# Altium PCB PCB1.PcbDoc
Units mm, origin at the board's own origin, x right, y up, seen from the top; angles counter-clockwise.
Board outline 31.39 x 23.51 mm, 2 copper layers (Top Layer, Bottom Layer); 24 components, 18 nets, 48 pads, 0 vias.
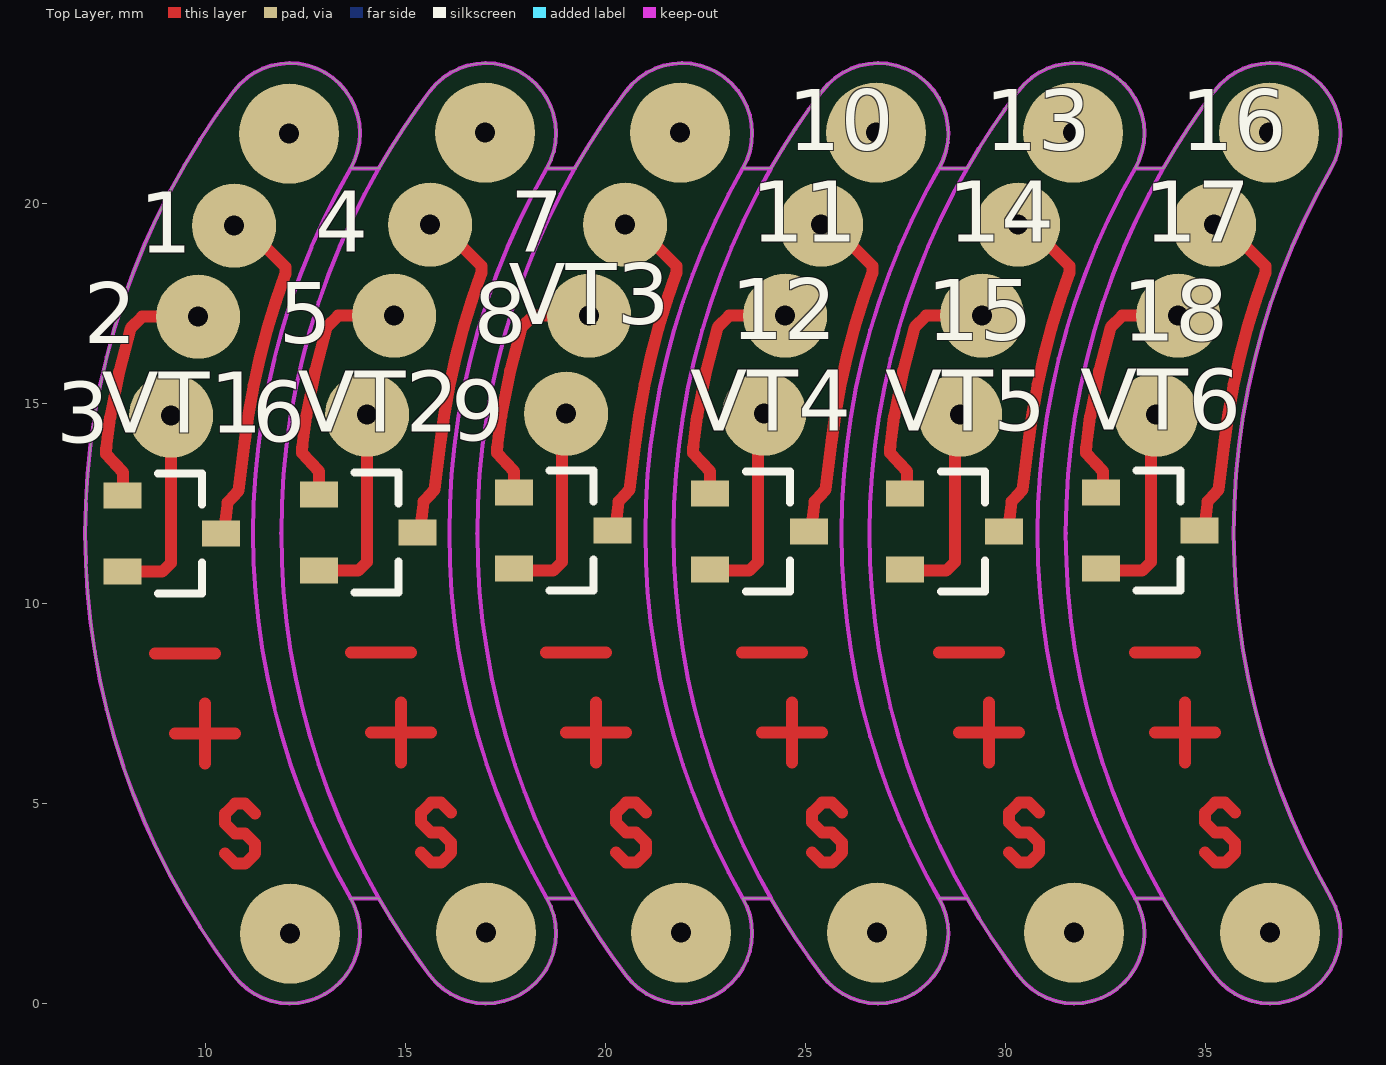
[diagram p0: Top Layer view]
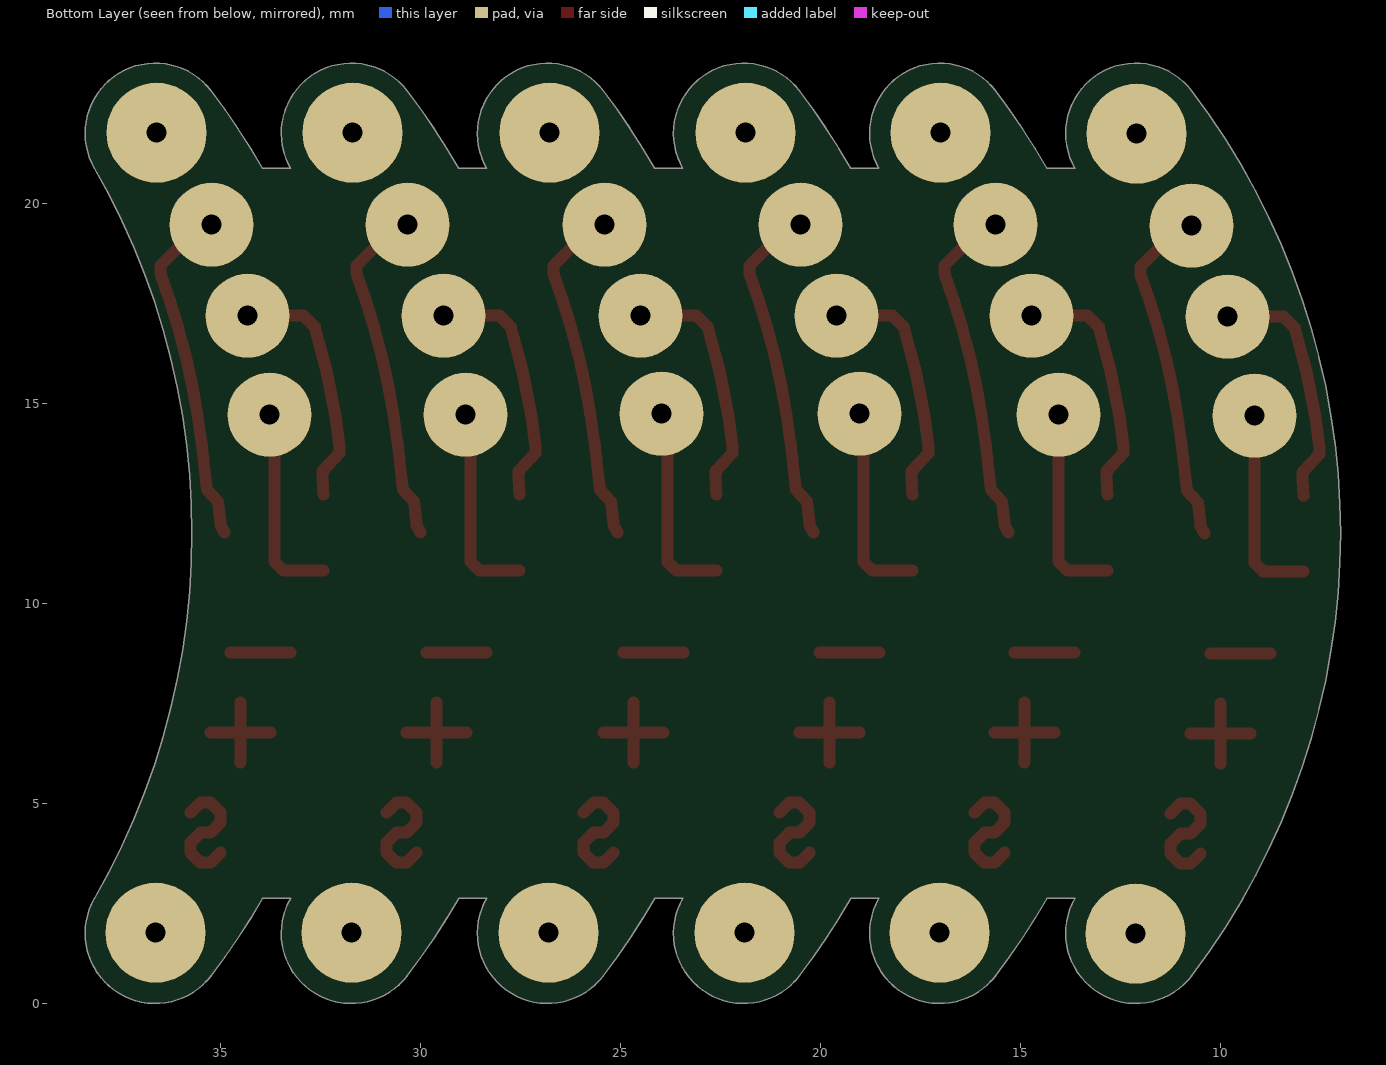
[diagram p1: Bottom Layer view, seen from below]
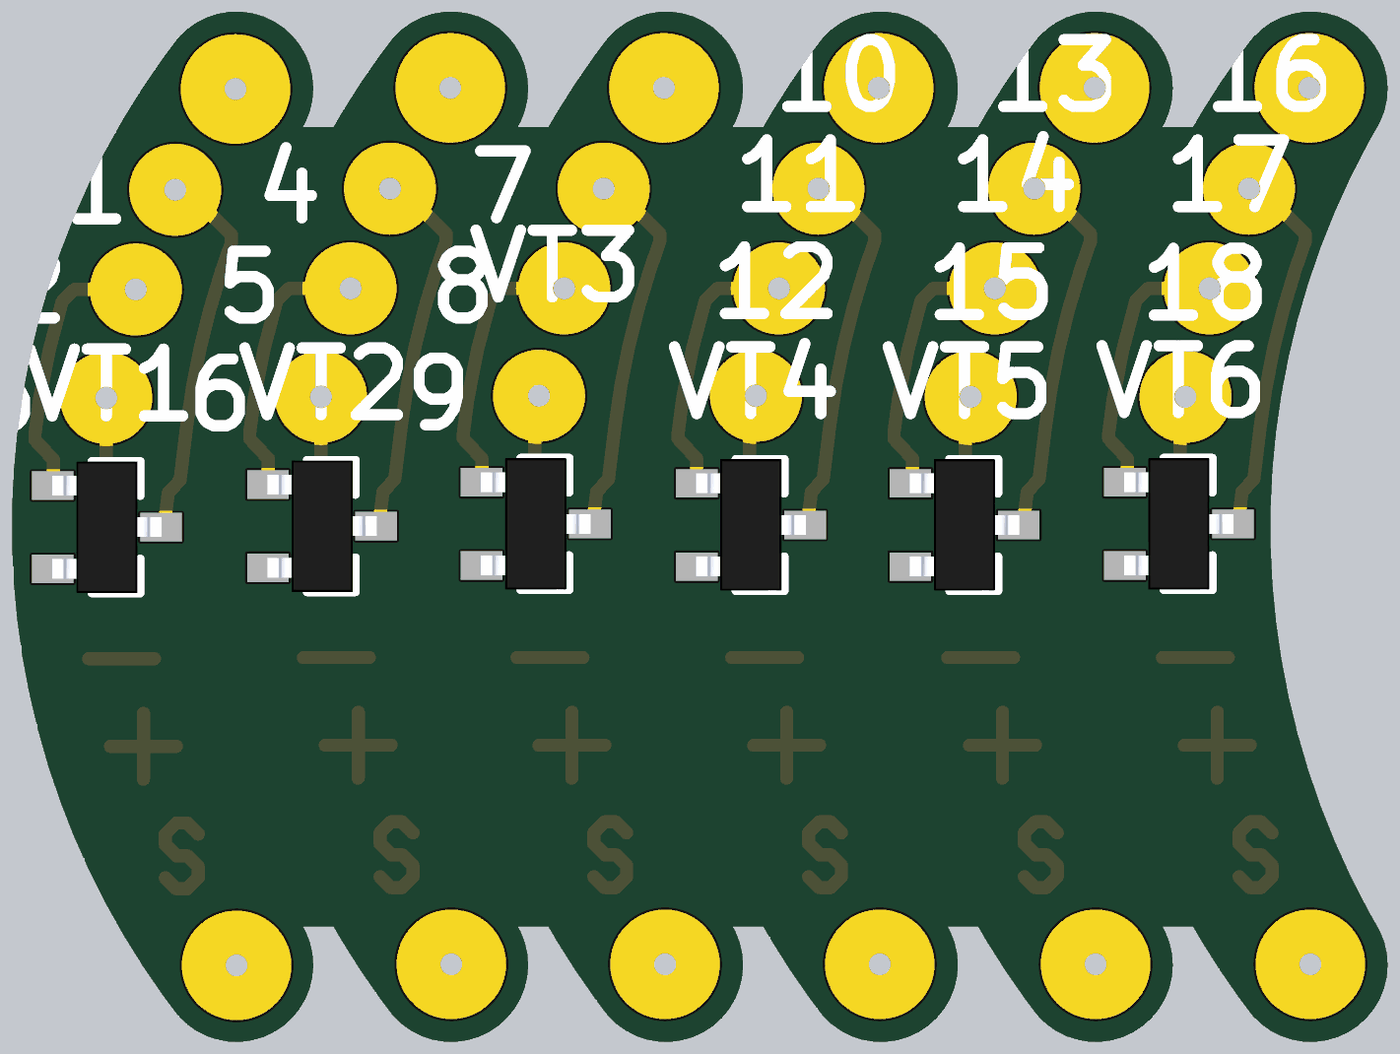
[diagram p2: 3D render of the assembled board from above, using the file's embedded part models]

## Layer stack, top to bottom
Top Solder: solder mask 0.0102, Solder Resist, Dk 3.5
Top Layer: signal copper 0.0356
Dielectric 1: dielectric 0.32, FR-4, Dk 4.8
Bottom Layer: signal copper 0.0356
Bottom Solder: solder mask 0.0102, Solder Resist, Dk 3.5

## Board outline
14.34,2.635 ccw(c30.203,11.76) 15.623,0.7 ccw(c17.02,1.76) 18.54,2.635 19.243,2.635 ccw(c35.105,11.76) 20.526,0.7 ccw(c21.923,1.76) 23.443,2.635 24.146,2.635 ccw(c40.008,11.76) 25.429,0.7 ccw(c26.826,1.76) 28.346,2.635 29.049,2.635 ccw(c44.911,11.76) 30.331,0.7 ccw(c31.729,1.76) 33.249,2.635 33.951,2.635 ccw(c49.814,11.76) 35.234,0.7 ccw(c36.631,1.76) 38.151,2.635 cw(c54.014,11.76) 38.151,20.886 ccw(c36.631,21.76) 35.234,22.82 ccw(c49.814,11.76) 33.951,20.886 33.249,20.886 ccw(c31.729,21.76) 30.331,22.82 ccw(c44.911,11.76) 29.049,20.886 28.346,20.886 ccw(c26.826,21.76) 25.429,22.82 ccw(c40.008,11.76) 24.146,20.886 23.443,20.886 ccw(c21.923,21.76) 20.526,22.82 ccw(c35.105,11.76) 19.243,20.886 18.54,20.886 ccw(c17.02,21.76) 15.623,22.82 ccw(c30.203,11.76) 14.34,20.886 13.638,20.886 ccw(c12.117,21.76) 10.72,22.82 ccw(c25.3,11.76) 10.72,0.7 ccw(c12.117,1.76) 13.638,2.635

## Design rules (kind name [scope] priority, off if disabled: settings)
AcuteAngle min_acute_angle [OnCopper] p1: minimum=3.50000000000000E+0001 checktracksonly=FALSE // Минимальный угол между примитивами топологии
BoardOutlineClearance board_outline_clearance_std [NOT (OnLayer('Bottom Overlay') OR OnLayer('Top Overlay'))] p1: gap=0.25 ignorepadtopadclearanceinfootprint=FALSE except(0: Arc-SplitContinuation Track-SplitContinuation SMDPad-SplitContinuation THPad-SplitContinuation Via-SplitContinuation Fill-SplitContinuation Poly-SplitContinuation Region-SplitContinuation Text-SplitContinuation) // Отступ элементов топологии от края фрезеруемой печатной платы
Clearance clearance_outer_35um_std [OnTopLayer OR OnBottomLayer] p1: gap=0.2 ignorepadtopadclearanceinfootprint=TRUE except(0.25: Arc-Hole Track-Hole SMDPad-Hole THPad-Hole Via-Hole Fill-Hole Poly-Hole Region-Hole Text-Hole) // Зазоры на внешних слоях
Clearance clearance_inner_35um_std [NOT (OnTopLayer Or OnBottomLayer)] p2: gap=0.2 ignorepadtopadclearanceinfootprint=FALSE except(0.25: Arc-Hole Track-Hole SMDPad-Hole THPad-Hole Via-Hole Fill-Hole Poly-Hole Region-Hole Text-Hole) // Зазоры на внутренних слоях
ComponentClearance [All] p1: gap=0 collisioncheckmode=3 verticalgap=0 showdistances=FALSE
DiffPairsRouting diff_pairs_routing [All] p1: maxlimit=0.127 minlimit=0.127 mostfreqgap=0.127 toplayer_minwidth=0.143 toplayer_maxwidth=0.143 toplayer_prefwidth=0.143 bottomlayer_minwidth=0.143 bottomlayer_maxwidth=0.143 bottomlayer_prefwidth=0.143 impedanceprofiledriven=TRUE impedanceprofileid={FD46899E-B5A2-4EF5-A302-5D2DB6A51F35} maxuncoupledlength=12.7 // Правила трассировки дифференциальных пар
HoleSize min_hole_size_std [IsPad] p1: absolutevalues=TRUE maxlimit=5.9 minlimit=0.6 maxpercent=80.000 minpercent=20.000 // Диаметр межслойного переходного отверстия
HoleSize min_hole_size_via_std [IsVia] p2: absolutevalues=TRUE maxlimit=5.9 minlimit=0.3 maxpercent=80.000 minpercent=20.000 // Минимальный диаметр монтажного отверстия
HoleToHoleClearance hole_to_hole_clearance_std [All] p1: gap=0.2 allowstackedmicrovias=FALSE // Минимальное расстояние между краями двух отверстий
MinimumAnnularRing min_via_ar_std [All] p1: minimumring=0.15 // Поясок площадки переходного отверстия (Annular ring VIA)
MinimumAnnularRing min_pad_ar_std [All] p2: minimumring=0.2 // Поясок монтажной контактной площадки (Annular ring PAD)
MinimumSolderMaskSliver min_solder_mask_bridge_std [All] p1: minsoldermaskwidth=0.15 // Мнимальная ширина масочного мостика
PlaneClearance plane_clearance_35um_std [All] p1: clearance=0.2 // Отступ полигона (для слоя plane) от элементов топологии
PlaneConnect [All] p1: planeconnectstyle=Relief reliefexpansion=0.5 reliefentries=4 reliefconductorwidth=0.2 reliefairgap=0.2
PolygonConnect poly_connect_to_pad<=0.3 [(AsMM(PadXSize_AllLayers)<=0.301) or (AsMM(PadYSize_AllLayers)<=0.301)] p1: thpad.connectstyle=Relief thpad.reliefconductorwidth=0.2 thpad.reliefentries=4 thpad.polygonreliefangle="90 Angle" thpad.airgapwidth=0.2 smdpad.connectstyle=Relief smdpad.reliefconductorwidth=0.2 smdpad.reliefentries=4 smdpad.polygonreliefangle="90 Angle" smdpad.airgapwidth=0.2 via.connectstyle=Direct via.reliefconductorwidth=0.254 via.reliefentries=4 via.polygonreliefangle="90 Angle" via.airgapwidth=0.254 // Правила подключения полигонов для падов от 0,3мм и меньше
PolygonConnect poly_connect_to_pad<=0.4 [(AsMM(PadXSize_AllLayers)<=0.401) or (AsMM(PadYSize_AllLayers)<=0.401)] p2: thpad.connectstyle=Relief thpad.reliefconductorwidth=0.26 thpad.reliefentries=4 thpad.polygonreliefangle="90 Angle" thpad.airgapwidth=0.2 smdpad.connectstyle=Relief smdpad.reliefconductorwidth=0.26 smdpad.reliefentries=4 smdpad.polygonreliefangle="90 Angle" smdpad.airgapwidth=0.2 via.connectstyle=Direct via.reliefconductorwidth=0.254 via.reliefentries=4 via.polygonreliefangle="90 Angle" via.airgapwidth=0.254 // Правила подключения полигонов для падов от 0,4 и меньше
PolygonConnect poly_connect_to_pad<=0.6 [(AsMM(PadXSize_AllLayers)<=0.601) or (AsMM(PadYSize_AllLayers)<=0.601)] p3: thpad.connectstyle=Relief thpad.reliefconductorwidth=0.33 thpad.reliefentries=4 thpad.polygonreliefangle="90 Angle" thpad.airgapwidth=0.2 smdpad.connectstyle=Relief smdpad.reliefconductorwidth=0.33 smdpad.reliefentries=4 smdpad.polygonreliefangle="90 Angle" smdpad.airgapwidth=0.2 via.connectstyle=Direct via.reliefconductorwidth=0.254 via.reliefentries=4 via.polygonreliefangle="90 Angle" via.airgapwidth=0.254 // Правила подключения полигонов для падов от 0,6мм и меньше
PolygonConnect poly_connect_to_pad<=0.7 [(AsMM(PadXSize_AllLayers)<=0.701) or (AsMM(PadYSize_AllLayers)<=0.701)] p4: thpad.connectstyle=Relief thpad.reliefconductorwidth=0.46 thpad.reliefentries=4 thpad.polygonreliefangle="90 Angle" thpad.airgapwidth=0.2 smdpad.connectstyle=Relief smdpad.reliefconductorwidth=0.46 smdpad.reliefentries=4 smdpad.polygonreliefangle="90 Angle" smdpad.airgapwidth=0.2 via.connectstyle=Direct via.reliefconductorwidth=0.254 via.reliefentries=4 via.polygonreliefangle="90 Angle" via.airgapwidth=0.254 // Правила подключения полигонов для падов от 0,7мм и меньше
PolygonConnect poly_connect_to_pad<=0.8 [(AsMM(PadXSize_AllLayers)<=0.8)or(AsMM(PadYSize_AllLayers)<=0.8)] p5: thpad.connectstyle=Relief thpad.reliefconductorwidth=0.53 thpad.reliefentries=4 thpad.polygonreliefangle="90 Angle" thpad.airgapwidth=0.3 smdpad.connectstyle=Relief smdpad.reliefconductorwidth=0.53 smdpad.reliefentries=4 smdpad.polygonreliefangle="90 Angle" smdpad.airgapwidth=0.2 via.connectstyle=Direct via.reliefconductorwidth=0.254 via.reliefentries=4 via.polygonreliefangle="90 Angle" via.airgapwidth=0.254 // Правила подключения полигонов для падов от 0,8мм и меньше
PolygonConnect poly_connect_to_pad<=1 [(AsMM(PadXSize_AllLayers)<=1.01)or(AsMM(PadYSize_AllLayers)<=1.01)] p6: thpad.connectstyle=Relief thpad.reliefconductorwidth=0.6 thpad.reliefentries=4 thpad.polygonreliefangle="90 Angle" thpad.airgapwidth=0.3 smdpad.connectstyle=Relief smdpad.reliefconductorwidth=0.6 smdpad.reliefentries=4 smdpad.polygonreliefangle="90 Angle" smdpad.airgapwidth=0.2 via.connectstyle=Direct via.reliefconductorwidth=0.254 via.reliefentries=4 via.polygonreliefangle="90 Angle" via.airgapwidth=0.254 // Правила подключения полигонов для падов от 1мм и меньше
PolygonConnect poly_connect_to_pad<=1.3 [(AsMM(PadXSize_AllLayers)<=1.31)or(AsMM(PadYSize_AllLayers)<=1.31)] p7: thpad.connectstyle=Relief thpad.reliefconductorwidth=0.66 thpad.reliefentries=4 thpad.polygonreliefangle="90 Angle" thpad.airgapwidth=0.3 smdpad.connectstyle=Relief smdpad.reliefconductorwidth=0.86 smdpad.reliefentries=4 smdpad.polygonreliefangle="90 Angle" smdpad.airgapwidth=0.2 via.connectstyle=Direct via.reliefconductorwidth=0.254 via.reliefentries=4 via.polygonreliefangle="90 Angle" via.airgapwidth=0.254 // Правила подключения полигонов для падов от 1,3мм и меньше
PolygonConnect poly_connect_to_pad<=1.6 [(AsMM(PadXSize_AllLayers)<=1.61)or(AsMM(PadYSize_AllLayers)<=1.61)] p8: thpad.connectstyle=Relief thpad.reliefconductorwidth=0.8 thpad.reliefentries=4 thpad.polygonreliefangle="90 Angle" thpad.airgapwidth=0.3 smdpad.connectstyle=Relief smdpad.reliefconductorwidth=1 smdpad.reliefentries=4 smdpad.polygonreliefangle="90 Angle" smdpad.airgapwidth=0.2 via.connectstyle=Direct via.reliefconductorwidth=0.254 via.reliefentries=4 via.polygonreliefangle="90 Angle" via.airgapwidth=0.254 // Правила подключения полигонов для падов от 1,6мм и меньше
PolygonConnect poly_connect_to_pad<=1.8 [(AsMM(PadXSize_AllLayers)<=1.8)or(AsMM(PadYSize_AllLayers)<=1.8)] p9: thpad.connectstyle=Relief thpad.reliefconductorwidth=1 thpad.reliefentries=4 thpad.polygonreliefangle="90 Angle" thpad.airgapwidth=0.3 smdpad.connectstyle=Relief smdpad.reliefconductorwidth=1.2 smdpad.reliefentries=4 smdpad.polygonreliefangle="90 Angle" smdpad.airgapwidth=0.2 via.connectstyle=Direct via.reliefconductorwidth=0.254 via.reliefentries=4 via.polygonreliefangle="90 Angle" via.airgapwidth=0.254 // Правила подключения полигонов для падов от 1,8мм и меньше
PolygonConnect poly_connect_to_pad<=2 [(AsMM(PadXSize_AllLayers)<=2.01)or(AsMM(PadYSize_AllLayers)<=2.01)] p10: thpad.connectstyle=Relief thpad.reliefconductorwidth=1.1 thpad.reliefentries=4 thpad.polygonreliefangle="90 Angle" thpad.airgapwidth=0.3 smdpad.connectstyle=Relief smdpad.reliefconductorwidth=1.4 smdpad.reliefentries=4 smdpad.polygonreliefangle="90 Angle" smdpad.airgapwidth=0.2 via.connectstyle=Direct via.reliefconductorwidth=0.254 via.reliefentries=4 via.polygonreliefangle="90 Angle" via.airgapwidth=0.254 // Правила подключения полигонов для падов от 2мм и меньше
PolygonConnect poly_connect_to_pad<=2.3 [(AsMM(PadXSize_AllLayers)<=2.31)or(AsMM(PadYSize_AllLayers)<=2.31)] p11: thpad.connectstyle=Relief thpad.reliefconductorwidth=1.2 thpad.reliefentries=4 thpad.polygonreliefangle="90 Angle" thpad.airgapwidth=0.3 smdpad.connectstyle=Relief smdpad.reliefconductorwidth=1.4 smdpad.reliefentries=4 smdpad.polygonreliefangle="90 Angle" smdpad.airgapwidth=0.2 via.connectstyle=Direct via.reliefconductorwidth=0.254 via.reliefentries=4 via.polygonreliefangle="90 Angle" via.airgapwidth=0.254 // Правила подключения полигонов для падов от 2,3мм и меньше
PolygonConnect poly_connect_to_pad<=2.5 [(AsMM(PadXSize_AllLayers)<=2.51)or(AsMM(PadYSize_AllLayers)<=2.51)] p12: thpad.connectstyle=Relief thpad.reliefconductorwidth=1.2 thpad.reliefentries=4 thpad.polygonreliefangle="90 Angle" thpad.airgapwidth=0.3 smdpad.connectstyle=Relief smdpad.reliefconductorwidth=1.4 smdpad.reliefentries=4 smdpad.polygonreliefangle="90 Angle" smdpad.airgapwidth=0.2 via.connectstyle=Direct via.reliefconductorwidth=0.254 via.reliefentries=4 via.polygonreliefangle="90 Angle" via.airgapwidth=0.254 // Правила подключения полигонов для падов от 2,5мм и меньше
PolygonConnect poly_connect_to_pad<=2.7 [(AsMM(PadXSize_AllLayers)<=2.71)or(AsMM(PadYSize_AllLayers)<=2.71)] p13: thpad.connectstyle=Relief thpad.reliefconductorwidth=1.4 thpad.reliefentries=4 thpad.polygonreliefangle="90 Angle" thpad.airgapwidth=0.3 smdpad.connectstyle=Relief smdpad.reliefconductorwidth=1.6 smdpad.reliefentries=4 smdpad.polygonreliefangle="90 Angle" smdpad.airgapwidth=0.2 via.connectstyle=Direct via.reliefconductorwidth=0.254 via.reliefentries=4 via.polygonreliefangle="90 Angle" via.airgapwidth=0.254 // Правила подключения полигонов для падов от 2,7мм и меньше
PolygonConnect poly_connect_to_pad<=3 [(AsMM(PadXSize_AllLayers)<=3.01)or(AsMM(PadYSize_AllLayers)<=3.01)] p14: thpad.connectstyle=Relief thpad.reliefconductorwidth=1.6 thpad.reliefentries=4 thpad.polygonreliefangle="90 Angle" thpad.airgapwidth=0.3 smdpad.connectstyle=Relief smdpad.reliefconductorwidth=1.8 smdpad.reliefentries=4 smdpad.polygonreliefangle="90 Angle" smdpad.airgapwidth=0.2 via.connectstyle=Direct via.reliefconductorwidth=0.254 via.reliefentries=4 via.polygonreliefangle="90 Angle" via.airgapwidth=0.254 // Правила подключения полигонов для падов от 3мм и меньше
PolygonConnect poly_connect_to_pad<=7 [(AsMM(PadXSize_AllLayers)<7.01)or(AsMM(PadYSize_AllLayers)<=7.01)] p15: thpad.connectstyle=Relief thpad.reliefconductorwidth=2 thpad.reliefentries=4 thpad.polygonreliefangle="90 Angle" thpad.airgapwidth=0.4 smdpad.connectstyle=Relief smdpad.reliefconductorwidth=2 smdpad.reliefentries=4 smdpad.polygonreliefangle="90 Angle" smdpad.airgapwidth=0.3 via.connectstyle=Direct via.reliefconductorwidth=0.254 via.reliefentries=4 via.polygonreliefangle="90 Angle" via.airgapwidth=0.254 // Правила подключения полигонов для падов от 7мм и меньше
PolygonConnect poly_connect_to_pad [All] p16: thpad.connectstyle=Relief thpad.reliefconductorwidth=0.25 thpad.reliefentries=4 thpad.polygonreliefangle="90 Angle" thpad.airgapwidth=0.2 smdpad.connectstyle=Relief smdpad.reliefconductorwidth=0.25 smdpad.reliefentries=4 smdpad.polygonreliefangle="90 Angle" smdpad.airgapwidth=0.2 via.connectstyle=Direct via.reliefconductorwidth=0.25 via.reliefentries=4 via.polygonreliefangle="90 Angle" via.airgapwidth=0.2 // Правила подключения полигонов общие
RoutingCorners [All] p1 off: cornerstyle=45-Degree minsetback=2.5 maxsetback=2.5
RoutingVias [All] p1: holewidth=0.3 width=0.6 viastyle="Through Hole" minholewidth=0.3 minwidth=0.6 maxholewidth=5.9 maxwidth=6.4
SilkToSilkClearance silk_to_silk_clearance_std [All] p1 off: silktosilkclearance=0.15 // Отступ текста шелкографии от других примитивов шелкографии
SilkToSolderMaskClearance silk_to_solder_mask_clearance_std [IsPad] p1 off: minsilkscreentomaskgap=0.15 clearancetoexposedcopper=FALSE // Минимальное расстояние между элементами шелкографии и вскрытой медью
SolderMaskExpansion solder_mask_expansion_std [All] p1: expansion=0.05 istentingtop=FALSE // Припуск паяльной масски
UnRoutedNet [All] p1: checkbadconnections=TRUE
Width width_35um_std [All] p1: maxlimit=10 minlimit=0.2 preferedwidth=0.2 checkconnectedcopper=TRUE // Ширина проводников (общая)
19 further rules are at their usual default settings.

## Components (designator, comment, footprint, x,y, rotation, side; value= is the part's Value field where it differs from the comment)
1 "" WIRE_SOLDER_POINT2.1_0.5 10.725,19.45 r90 top
2 "" WIRE_SOLDER_POINT2.1_0.5 9.825,17.175 r90 top
3 "" WIRE_SOLDER_POINT2.1_0.5 9.15,14.7 r90 top
4 "" WIRE_SOLDER_POINT2.1_0.5 15.625,19.475 r90 top
5 "" WIRE_SOLDER_POINT2.1_0.5 14.725,17.2 r90 top
6 "" WIRE_SOLDER_POINT2.1_0.5 14.05,14.725 r90 top
7 "" WIRE_SOLDER_POINT2.1_0.5 20.5,19.475 r90 top
8 "" WIRE_SOLDER_POINT2.1_0.5 19.6,17.2 r90 top
9 "" WIRE_SOLDER_POINT2.1_0.5 19.025,14.75 r90 top
10 "" WIRE_SOLDER_POINT2.1_0.5 25.4,19.475 r0 top
11 "" WIRE_SOLDER_POINT2.1_0.5 24.5,17.2 r0 top
12 "" WIRE_SOLDER_POINT2.1_0.5 23.975,14.75 r0 top
13 "" WIRE_SOLDER_POINT2.1_0.5 30.325,19.475 r0 top
14 "" WIRE_SOLDER_POINT2.1_0.5 29.425,17.2 r0 top
15 "" WIRE_SOLDER_POINT2.1_0.5 28.875,14.725 r0 top
16 "" WIRE_SOLDER_POINT2.1_0.5 35.225,19.475 r0 top
17 "" WIRE_SOLDER_POINT2.1_0.5 34.325,17.2 r0 top
18 "" WIRE_SOLDER_POINT2.1_0.5 33.775,14.725 r0 top
VT1 "FDN340P" SOT23 9.165,11.75 r0 top
VT2 "FDN340P" SOT23 14.075,11.775 r0 top
VT3 "FDN340P" SOT23 18.95,11.825 r0 top
VT4 "FDN340P" SOT23 23.86,11.8 r0 top
VT5 "FDN340P" SOT23 28.735,11.8 r0 top
VT6 "FDN340P" SOT23 33.625,11.825 r0 top

## Footprints (in the part's own frame and the unit in brackets; to place one, negate y for a bottom-side part, rotate by r counter-clockwise, add the part's x,y. Pads: shape width x height; smd on the part's side, far side on the other; paste and mask are expansions set on the pad)
SOT23 [mm] "mosfet"
  rect 0.95x0.65 smd: 1(-1.235,0.95) 2(-1.235,-0.95) 3(1.235,0)
  silkscreen extent -0.34,-1.5 0.76,1.5, body extent -1.25,-1.5 1.25,1.5, height 1.05
WIRE_SOLDER_POINT2.1_0.5 [mm] "Отверстие для пайки провода"
  round 2.1 hole 0.5: 1(0,0)

## Part data
1 2 3 4 5 6 7 8 9 10 11 12 13 14 15 16 17 18: library part SolderPoint, "Контакт"
VT1 VT2 VT3 VT4 VT5 VT6: Name=FDN340P

## Free pads (board coordinates)
  round 2.5 hole 0.5: ""(12.1,21.75) ""(12.125,1.75) ""(17,21.775) ""(17.025,1.775) ""(21.875,21.775) ""(21.9,1.775) ""(26.775,21.775) ""(26.8,1.775) ""(31.7,21.775) ""(31.725,1.775) ""(36.6,21.775) ""(36.625,1.775)

## Nets (pads, with @x,y where several pads share a name; then routed paths per layer and width w, separated by ;. In a path a pad name is that pad's centre, name@x,y a point inside that pad or via, vN(x,y) a via of type N, cw(c..) or ccw(c..) an arc to the next point about the centre after c; other vN are vias at no path point)
Net1_1: 1.1 VT1.3 | length 8.7
  Top Layer w0.3: VT1.3 10.499,11.925 10.499,11.994 10.565,12.531 10.698,12.676 10.835,12.824 10.932,13.623 10.981,14.023 cw(c29.5,11.76) 12.006,18.241 12.006,18.295 12.006,18.419 10.975,19.45 1.1
Net2_1: 2.1 VT1.1 | length 6.2
  Top Layer w0.3: VT1.1 7.937,12.875 7.949,13.16 7.949,13.283 7.525,13.745 7.525,13.881 7.528,13.901 7.626,14.653 7.628,14.663 7.851,15.793 8.143,16.893 8.425,17.175 2.1
Net3_1: 3.1 VT1.2 | length 5
  Top Layer w0.3: VT1.2 8.927,10.8 9.15,11.023 3.1
Net4_1: 4.1 VT2.3 | length 8.7
  Top Layer w0.3: VT2.3@15.3,11.775 15.399,11.95 15.399,12.019 15.465,12.556 15.598,12.701 15.735,12.849 15.832,13.648 15.881,14.048 cw(c34.4,11.785) 16.906,18.266 16.906,18.32 16.906,18.444 15.875,19.475 4.1
Net5_1: 5.1 VT2.1 | length 6.2
  Top Layer w0.3: VT2.1@12.83,12.725 12.837,12.9 12.849,13.185 12.849,13.308 12.425,13.77 12.425,13.906 12.428,13.926 12.526,14.678 12.528,14.688 12.751,15.818 13.043,16.918 13.325,17.2 5.1
Net6_1: 6.1 VT2.2 | length 5.1
  Top Layer w0.3: VT2.2@12.83,10.825 13.827,10.825 14.05,11.048 6.1 6.1@14,14.675
Net7_1: 7.1 VT3.3 | length 8.7
  Top Layer w0.3: VT3.3@20.175,11.775 20.274,11.95 20.274,12.019 20.34,12.556 20.473,12.701 20.61,12.849 20.707,13.648 20.756,14.048 cw(c39.275,11.785) 21.781,18.266 21.781,18.32 21.781,18.444 20.75,19.475 7.1
Net8_1: 8.1 VT3.1 | length 6.2
  Top Layer w0.3: VT3.1@17.705,12.725 17.712,12.9 17.724,13.185 17.724,13.308 17.3,13.77 17.3,13.906 17.303,13.926 17.401,14.678 17.403,14.688 17.626,15.818 17.918,16.918 18.2,17.2 8.1
Net9_1: 9.1 VT3.2 | length 5
  Top Layer w0.3: VT3.2@17.705,10.825 18.702,10.825 18.925,11.048 9.1@18.925,14.725
Net10_1: 10.1 VT4.3 | length 8.7
  Top Layer w0.3: VT4.3@25.075,11.775 25.174,11.95 25.174,12.019 25.24,12.556 25.373,12.701 25.51,12.849 25.607,13.648 25.656,14.048 cw(c44.175,11.785) 26.681,18.266 26.681,18.32 26.681,18.444 25.65,19.475 10.1
Net11_1: 11.1 VT4.1 | length 6.2
  Top Layer w0.3: VT4.1@22.605,12.725 22.612,12.9 22.624,13.185 22.624,13.308 22.2,13.77 22.2,13.906 22.203,13.926 22.301,14.678 22.303,14.688 22.526,15.818 22.818,16.918 23.1,17.2 11.1
Net12_1: 12.1 VT4.2 | length 5
  Top Layer w0.3: VT4.2@22.605,10.825 23.602,10.825 23.825,11.048 12.1@23.825,14.725
Net13_1: 13.1 VT5.3 | length 8.7
  Top Layer w0.3: VT5.3@30,11.775 30.099,11.95 30.099,12.019 30.165,12.556 30.298,12.701 30.435,12.849 30.532,13.648 30.581,14.048 cw(c49.1,11.785) 31.606,18.266 31.606,18.32 31.606,18.444 30.575,19.475 13.1
Net14_1: 14.1 VT5.1 | length 6.2
  Top Layer w0.3: VT5.1@27.53,12.725 27.537,12.9 27.549,13.185 27.549,13.308 27.125,13.77 27.125,13.906 27.128,13.926 27.226,14.678 27.228,14.688 27.451,15.818 27.743,16.918 28.025,17.2 14.1
Net15_1: 15.1 VT5.2 | length 5
  Top Layer w0.3: VT5.2@27.53,10.825 28.527,10.825 28.75,11.048 15.1@28.75,14.725
Net16_1: 16.1 VT6.3 | length 8.7
  Top Layer w0.3: VT6.3@34.9,11.775 34.999,11.95 34.999,12.019 35.065,12.556 35.198,12.701 35.335,12.849 35.432,13.648 35.481,14.048 cw(c54,11.785) 36.506,18.266 36.506,18.32 36.506,18.444 35.475,19.475 16.1
Net17_1: 17.1 VT6.1 | length 6.2
  Top Layer w0.3: VT6.1@32.43,12.725 32.437,12.9 32.449,13.185 32.449,13.308 32.025,13.77 32.025,13.906 32.028,13.926 32.126,14.678 32.128,14.688 32.351,15.818 32.643,16.918 32.925,17.2 17.1
Net18_1: 18.1 VT6.2 | length 5
  Top Layer w0.3: VT6.2@32.43,10.825 33.427,10.825 33.65,11.048 18.1@33.65,14.725
copper on no net: | length 47.2
  Top Layer w0.3: 8.75,8.75 10.25,8.75 ; 9.25,6.75 10.75,6.75 ; 10,6 10,7.5 ; 10.5,3.75 10.75,3.5 11,3.5 11.25,3.75 11.25,4 11,4.25 10.75,4.25 10.5,4.5 10.5,4.75 10.75,5 11,5 11.25,4.75 ; 13.65,8.775 15.15,8.775 ; 14.15,6.775 15.65,6.775 ; 14.9,6.025 14.9,7.525 ; 15.4,3.775 15.65,3.525 15.9,3.525 16.15,3.775 16.15,4.025 15.9,4.275 15.65,4.275 15.4,4.525 15.4,4.775 15.65,5.025 15.9,5.025 16.15,4.775 ; 18.525,8.775 20.025,8.775 ; 19.025,6.775 20.525,6.775 ; 19.775,6.025 19.775,7.525 ; 20.275,3.775 20.525,3.525 20.775,3.525 21.025,3.775 21.025,4.025 20.775,4.275 20.525,4.275 20.275,4.525 20.275,4.775 20.525,5.025 20.775,5.025 21.025,4.775 ; 23.425,8.775 24.925,8.775 ; 23.925,6.775 25.425,6.775 ; 24.675,6.025 24.675,7.525 ; 25.175,3.775 25.425,3.525 25.675,3.525 25.925,3.775 25.925,4.025 25.675,4.275 25.425,4.275 25.175,4.525 25.175,4.775 25.425,5.025 25.675,5.025 25.925,4.775 ; 28.35,8.775 29.85,8.775 ; 28.85,6.775 30.35,6.775 ; 29.6,6.025 29.6,7.525 ; 30.1,3.775 30.35,3.525 30.6,3.525 30.85,3.775 30.85,4.025 30.6,4.275 30.35,4.275 30.1,4.525 30.1,4.775 30.35,5.025 30.6,5.025 30.85,4.775 ; 33.25,8.775 34.75,8.775 ; 33.75,6.775 35.25,6.775 ; 34.5,6.025 34.5,7.525 ; 35,3.775 35.25,3.525 35.5,3.525 35.75,3.775 35.75,4.025 35.5,4.275 35.25,4.275 35,4.525 35,4.775 35.25,5.025 35.5,5.025 35.75,4.775

## Keep-outs
Top Layer:
  circle w0.1: c21.708,11.76 r0.003
  circle w0.1: c26.611,11.76 r0.003
  circle w0.1: c16.806,11.76 r0.003
  circle w0.1: c31.514,11.76 r0.003
  circle w0.1: c11.903,11.76 r0.003
  lines w0.1: 13.638,2.635 cw(c12.117,1.76) 10.72,0.7 cw(c25.3,11.76) 10.72,22.82 cw(c12.117,21.76) 13.638,20.886 ; 13.638,2.635 cw(c29.5,11.76) 13.638,20.886 ; 13.638,2.635 14.34,2.635 ; 13.638,20.886 14.34,20.886 ; 14.34,2.635 ccw(c30.203,11.76) 15.623,0.7 ccw(c17.02,1.76) 18.54,2.635 ; 14.34,2.635 cw(c30.203,11.76) 14.34,20.886 ; 14.34,20.886 cw(c30.203,11.76) 15.623,22.82 cw(c17.02,21.76) 18.54,20.886 ; 18.54,2.635 cw(c34.403,11.76) 18.54,20.886 ; 18.54,2.635 19.243,2.635 ; 18.54,20.886 19.243,20.886 ; 19.243,2.635 ccw(c35.106,11.76) 20.526,0.7 ccw(c21.923,1.76) 23.443,2.635 ; 19.243,2.635 cw(c35.106,11.76) 19.243,20.886 ; 19.243,20.886 cw(c35.106,11.76) 20.526,22.82 cw(c21.923,21.76) 23.443,20.886 ; 23.443,2.635 cw(c39.306,11.76) 23.443,20.886 ; 23.443,2.635 24.146,2.635 ; 23.443,20.886 24.146,20.886 ; 24.146,2.635 ccw(c40.008,11.76) 25.429,0.7 ccw(c26.826,1.76) 28.346,2.635 ; 24.146,2.635 cw(c40.008,11.76) 24.146,20.886 ; 24.146,20.886 cw(c40.008,11.76) 25.429,22.82 cw(c26.826,21.76) 28.346,20.886 ; 28.346,2.635 cw(c44.208,11.76) 28.346,20.886 ; 28.346,2.635 29.049,2.635 ; 28.346,20.886 29.049,20.886 ; 29.049,2.635 ccw(c44.911,11.76) 30.331,0.7 ccw(c31.729,1.76) 33.249,2.635 ; 29.049,2.635 cw(c44.911,11.76) 29.049,20.886 ; 29.049,20.886 cw(c44.911,11.76) 30.331,22.82 cw(c31.729,21.76) 33.249,20.886 ; 33.249,2.635 cw(c49.111,11.76) 33.249,20.886 ; 33.249,2.635 33.951,2.635 ; 33.249,20.886 33.951,20.886 ; 33.951,2.635 ccw(c49.814,11.76) 35.234,0.7 ccw(c36.631,1.76) 38.151,2.635 cw(c54.014,11.76) 38.151,20.886 ccw(c36.631,21.76) 35.234,22.82 ccw(c49.814,11.76) 33.951,20.886 ; 33.951,2.635 cw(c49.814,11.76) 33.951,20.886

## Silkscreen, mask and mechanical layers (free items; w line width, h text height)
Mechanical 1:
  circle w0.006: c33.614,11.76 r0.003
  circle w0.013: c36.631,1.76 r1
  circle w0.013: c36.631,21.76 r1
  circle w0.006: c28.711,11.76 r0.003
  circle w0.013: c31.729,1.76 r1
  circle w0.013: c31.729,21.76 r1
  circle w0.006: c23.808,11.76 r0.003
  circle w0.013: c26.826,1.76 r1
  circle w0.013: c26.826,21.76 r1
  circle w0.006: c18.906,11.76 r0.003
  circle w0.013: c21.923,1.76 r1
  circle w0.013: c21.923,21.76 r1
  circle w0.006: c14.003,11.76 r0.003
  circle w0.013: c17.02,1.76 r1
  circle w0.013: c17.02,21.76 r1
  circle w0.006: c9.1,11.76 r0.003
  circle w0.013: c12.117,1.76 r1
  circle w0.013: c12.117,21.76 r1